# Altium PCB PCB7.PcbDoc
Units mm, origin at the board's own origin, x right, y up, seen from the top; angles counter-clockwise.
Board outline 18 x 29.72 mm, 2 copper layers (Top Layer, Bottom Layer); 24 components, 19 nets, 82 pads, 6 vias.
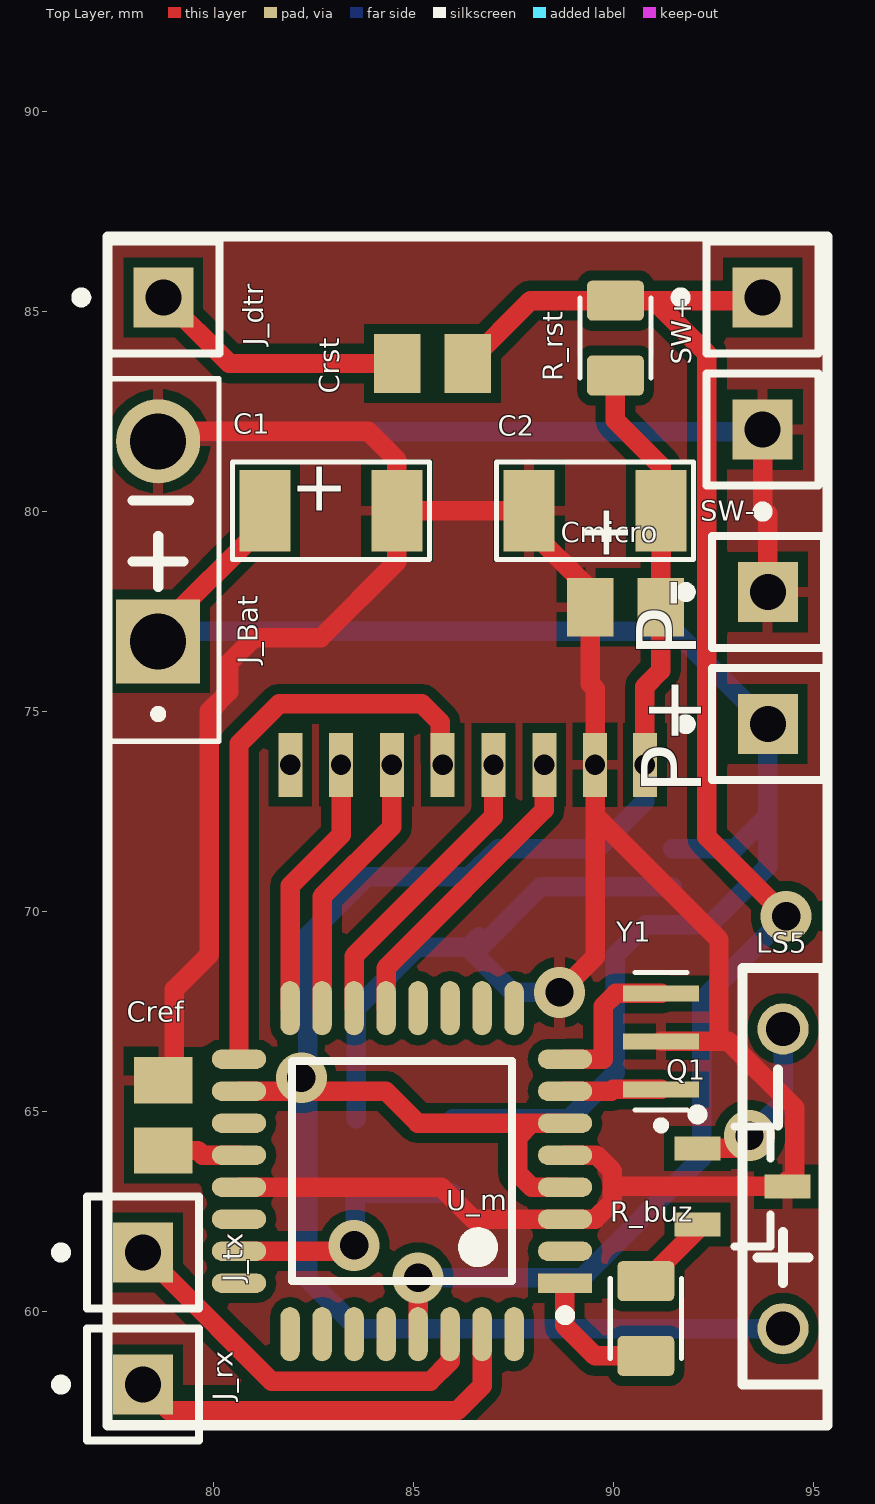
[diagram p0: Top Layer view]
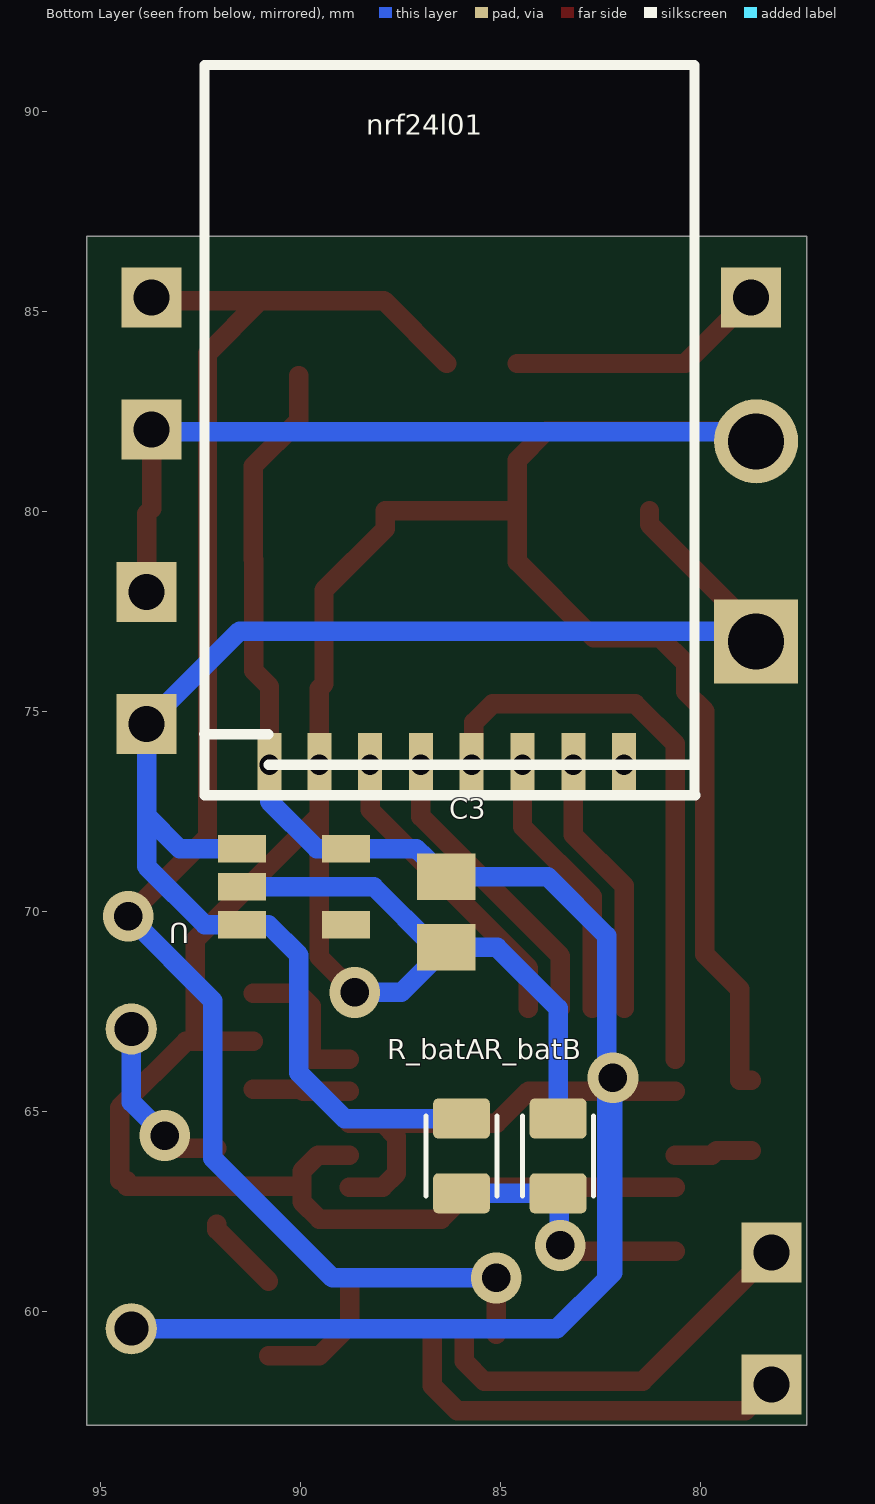
[diagram p1: Bottom Layer view, seen from below]
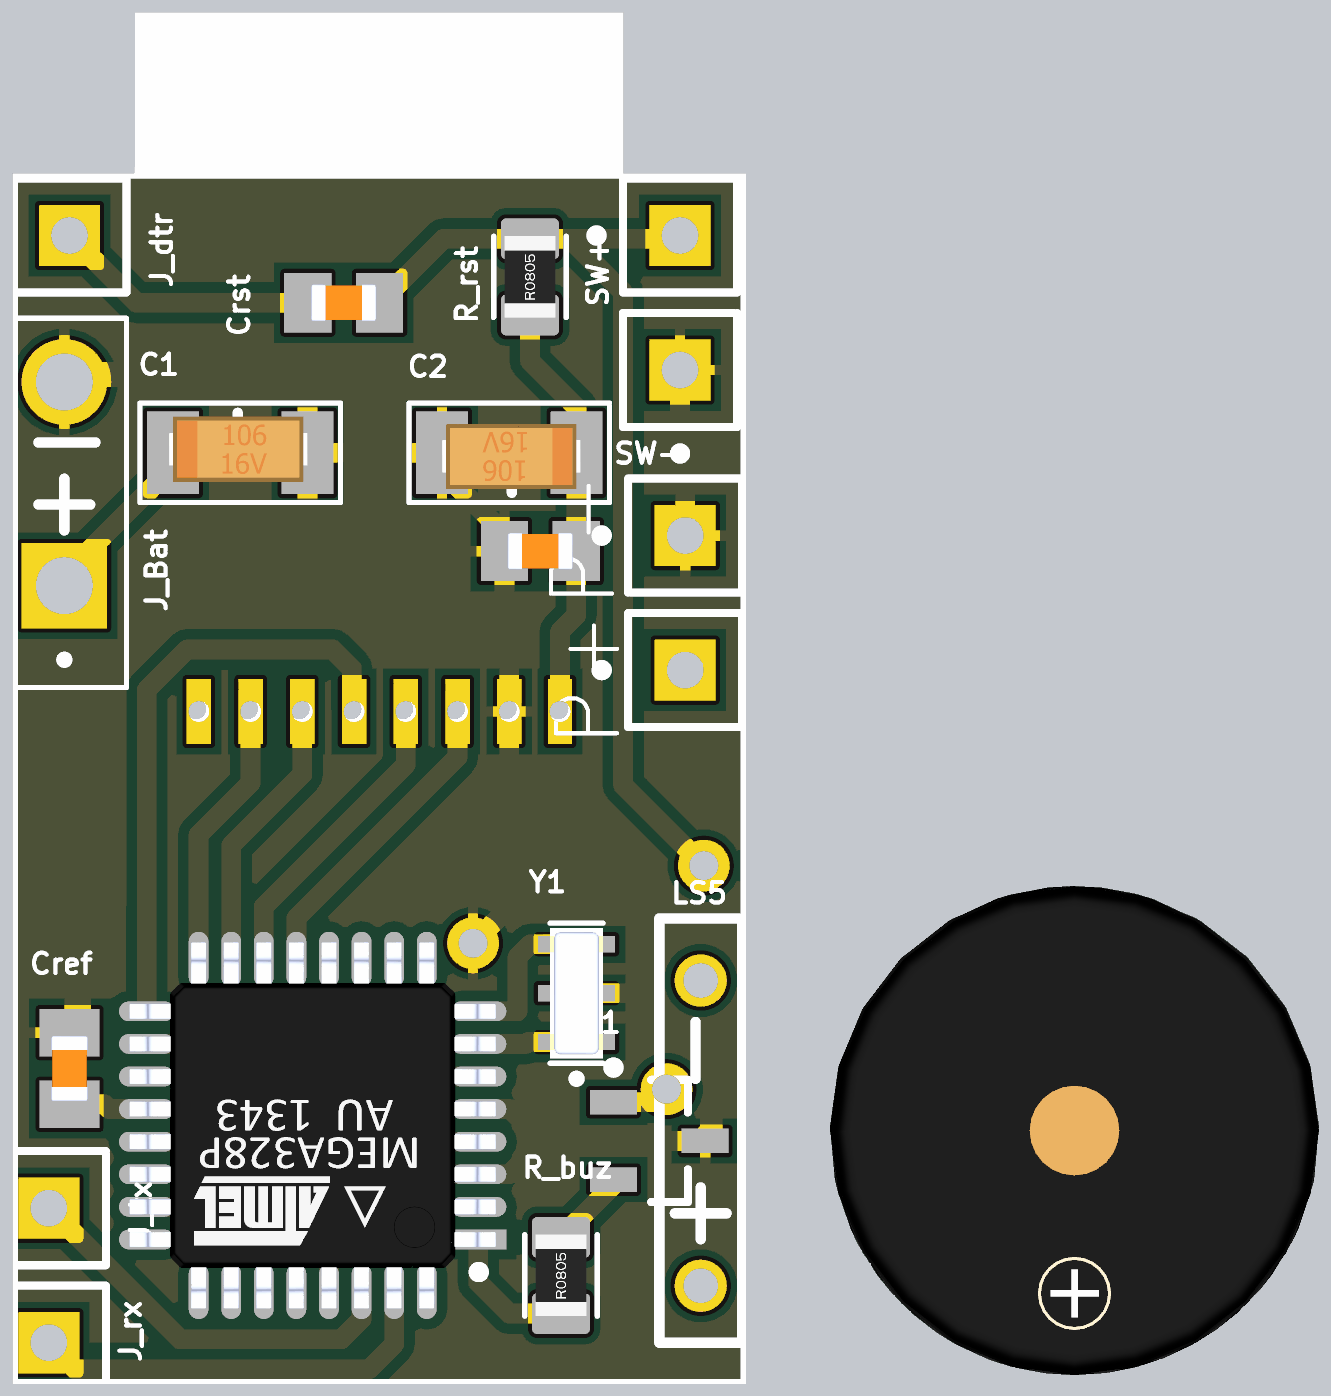
[diagram p2: 3D render of the assembled board from above, using the file's embedded part models]
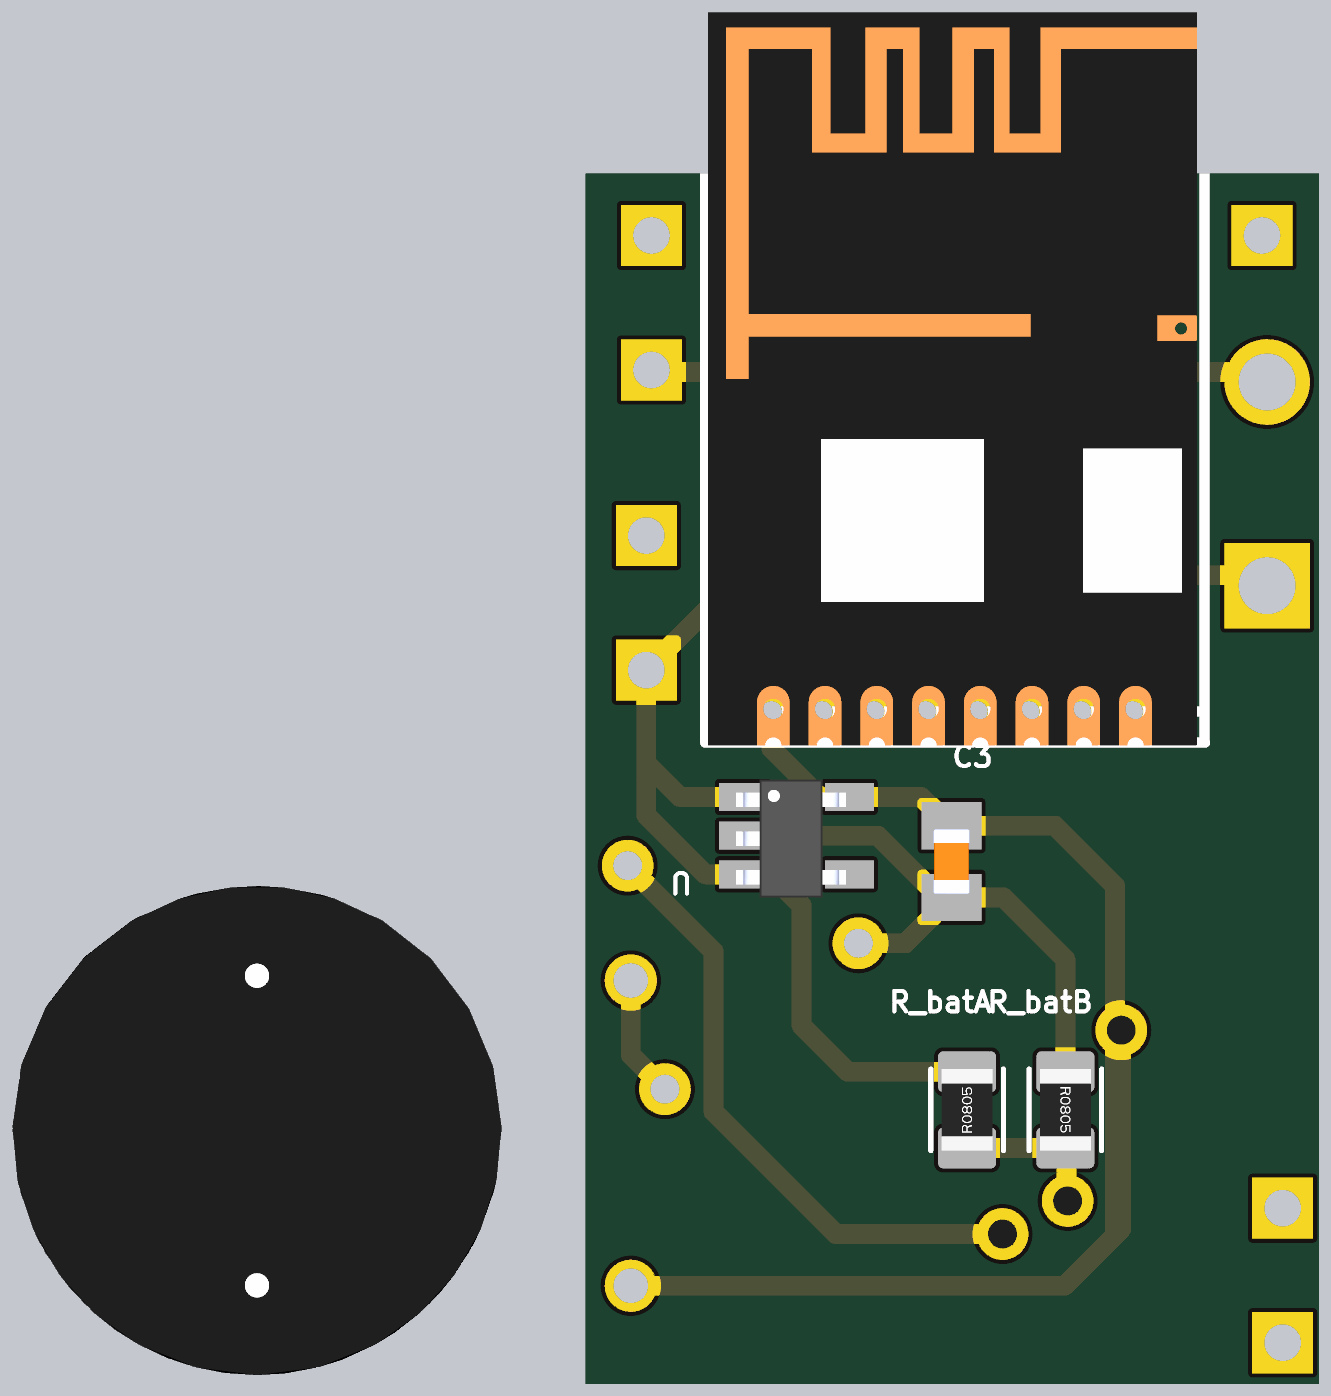
[diagram p3: 3D render of the assembled board from below, using the file's embedded part models]

## Layer stack, top to bottom
Top Solder: solder mask 0.0102, Solder Resist, Dk 3.5
Top Layer: signal copper 0.0356
Dielectric 1: dielectric 0.32, FR-4, Dk 4.8
Bottom Layer: signal copper 0.0356
Bottom Solder: solder mask 0.0102, Solder Resist, Dk 3.5

## Board outline
77.343,57.15 77.343,86.868 95.343,86.868 95.343,57.15

## Design rules (kind name [scope] priority, off if disabled: settings)
Clearance [All] p1: gap=0.254 ignorepadtopadclearanceinfootprint=FALSE except(0: Arc-Hole Track-Hole SMDPad-Hole THPad-Hole Via-Hole Fill-Hole Poly-Hole Region-Hole Text-Hole)
PolygonConnect [All] p1: connectstyle=Relief reliefconductorwidth=0.254 reliefentries=4 polygonreliefangle="90 Angle" airgapwidth=0.254
RoutingVias [All] p1: holewidth=0.711 width=1.27 viastyle="Through Hole" minholewidth=0.711 minwidth=1.27 maxholewidth=0.711 maxwidth=1.27
SolderMaskExpansion [All] p1: expansion=0.102 istentingtop=FALSE
Width [All] p1: maxlimit=0.486 minlimit=0.38 preferedwidth=0.486
30 further rules are at their usual default settings.

## Components (designator, comment, footprint, x,y, rotation, side; value= is the part's Value field where it differs from the comment)
C1 "10uf" CT1206 82.931,80.01 r0 top
C2 "10uf" CT1206 89.535,80.01 r180 top
C3 "0.1uf" CAPC2012X94N 86.36,69.977 r90 bottom
Cmicro "0.1uf" CAPC2012X94N 90.297,77.597 r0 top
Cref "0.1uf" CAPC2012X94N 78.74,64.897 r270 top
Crst "0.1uf" CAPC2012X94N 85.471,83.693 r0 top
J_Bat "KF301-2P" HANDSON_KF301-2P 78.613,79.248 r90 top
J_dtr "Socket" PIN1 78.74,85.344 r90 top
J_rx "Socket" PIN1 78.232,58.166 r90 top
J_tx "Socket" PIN1 78.232,61.468 r90 top
LS5 "PS1240P02BT" XDCR_PS1240P02BT 94.107,63.5 r90 top
nrf24l01 "SMD" NRF24L01 90.805,72.898 r90 bottom locked
P+ "Plug" PIN1 93.853,74.676 r90 top
P- "Plug" PIN1 93.853,77.978 r90 top
Q1 "QNPN" SOT-23B_N 93.218,63.119 r0 top
R_batA "470k" RESC2012X65N 85.979,63.881 r90 bottom
R_batB "1M" RESC2012X65N 83.566,63.881 r270 bottom
R_buz "220" RESC2012X65N 90.805,59.817 r90 top
R_rst "10k" RESC2012X65N 90.043,84.328 r90 top
SW+ "Plug" PIN1 93.726,85.344 r90 top
SW- "Plug" PIN1 93.726,82.042 r180 top
U "3.3reg" SOT-23-5 90.17,70.612 r270 bottom
U_m "ATMEGA328PB-AUR" Microchip_C04-074_IPC_C 84.709,63.5 r180 top
Y1 "clock" OSC_CSTCE8M00G52-R0 91.186,66.745 r90 top

## Footprints (in the part's own frame and the unit in brackets; to place one, negate y for a bottom-side part, rotate by r counter-clockwise, add the part's x,y. Pads: shape width x height; smd on the part's side, far side on the other; paste and mask are expansions set on the pad)
CAPC2012X94N [mm]
  rect 1.16x1.47 smd: 1(-0.88,0) 2(0.88,0)
  body extent -0.8,-0.45 0.8,0.45, height 0.79
CT1206 [mil]
  rect 50x80 smd: NEG(65,0) POS(-65,0)
  silkscreen extent -97,-48 97,48, body extent -69,-28 65,35, height 67
HANDSON_KF301-2P [mm]
  rect 2.1x2.1 hole 1.4: 1(-2.5,0)
  round 2.1 hole 1.4: 2(2.5,0)
  silkscreen extent -5,-1.52 4.06,1.27
Microchip_C04-074_IPC_C [mm]
  rect 1.355x0.486 smd paste+0 mask+0: 1(-4.075,2.8)
  rrect100% 1.355x0.486 smd paste+0 mask+0: 2(-4.075,2) 3(-4.075,1.2) 4(-4.075,0.4) 5(-4.075,-0.4) 6(-4.075,-1.2) 7(-4.075,-2) 8(-4.075,-2.8) 17(4.075,-2.8) 18(4.075,-2) 19(4.075,-1.2) 20(4.075,-0.4) 21(4.075,0.4) 22(4.075,1.2) 23(4.075,2) 24(4.075,2.8)
  rrect100% 0.486x1.355 smd paste+0 mask+0: 9(-2.8,-4.075) 10(-2,-4.075) 11(-1.2,-4.075) 12(-0.4,-4.075) 13(0.4,-4.075) 14(1.2,-4.075) 15(2,-4.075) 16(2.8,-4.075) 25(2.8,4.075) 26(2,4.075) 27(1.2,4.075) 28(0.4,4.075) 29(-0.4,4.075) 30(-1.2,4.075) 31(-2,4.075) 32(-2.8,4.075)
  silkscreen extent -4.2,-2.75 2.75,3.72, body extent -4.5,-4.5 4.5,4.5, height 1
NRF24L01 [mil] "smd"
  rect 62.99x23.62 hole 20: 1(30,-1) 2(30,-49.99) 3(30,-100) 4(30,-150) 5(30,-200) 6(30,-250) 7(30,-300) 8(30,-350)
  silkscreen extent 0,-420 719,63, body extent -3,-412 706,60, height 32
OSC_CSTCE8M00G52-R0 [mm]
  rect 0.4x1.9 smd: 1(-1.2,0) 2(0,0) 3(1.2,0)
  silkscreen extent -2.2,-0.65 1.72,0.65, body extent -1.6,-0.65 1.6,0.65, height 0.8
PIN1 [mm] "Connector; Plug"
  rect 1.5x1.5 hole 0.9: 1(0,0)
  silkscreen extent -1.4,-1.4 1.4,2.17
RESC2012X65N [mm]
  rrect25% 1x1.42 smd: 1(-0.935,0) 2(0.935,0)
  silkscreen extent -1,-0.89 1,0.89, body extent -1,-0.63 1,0.62, height 0.6
SOT-23-5 [mm]
  rect 0.69x1.2 smd: 1(-0.95,-1.3) 2(0,-1.3) 3(0.95,-1.3) 4(0.95,1.3) 5(-0.95,1.3)
  body extent -1.38,-1.48 1.52,1.22, height 1.45
SOT-23B_N [mm] "SOT23, 3-Leads, Body 2.9x1.3mm, Pitch 0.95mm, Lead Span 2.4mm, IPC Medium Density"
  rect 1.15x0.6 smd: 1(-1.125,0.95) 2(-1.125,-0.95) 3(1.125,0)
  silkscreen extent -1.25,-1.5 0.7,1.92, body extent -0.7,-1.5 0.7,1.5, height 1.14
XDCR_PS1240P02BT [mm]
  round 1.28 hole 0.85: 1(-3.937,-0.127) 2(3.556,-0.127)
  silkscreen extent -5.33,-1.14 5.08,0.89, body extent -6.13,-15.3 5.87,-3.3

## Part data
C1 C2: library part TANTALUM-SMD-10UF-20V-20%(1206), "10ÂµF Molded Tantalum Capacitors 20V 1206 _3216 Metric_ 5Ohm", Package="1206 Kemet", Availability=Unavailable, MF=KEMET, MP=T491A106M020AT, Price=None, SnapEDA_Link=https://www.snapeda.com/parts/T491A106M020AT/KEMET/view-part/104616/?ref=snap
C3 Cmicro Cref Crst: library part 0805YC103J4T2A, "10000pF Â±5% 16V Ceramic Capacitor X7R 0805 _2012 Metric_", Package="2012 AVX", Availability=Unavailable, MF=AVX, MP=0805YC103J4T2A, Price=None, SnapEDA_Link=https://www.snapeda.com/parts/0805YC103J4T2A/AVX/view-part/606803/?ref=snap
J_Bat: "2 Pin Terminal Block 5mm Pitch", Package=Package, Availability=Unavailable, MF="Handson Technology", MP=KF301-2P, Price=None, SnapEDA_Link=https://www.snapeda.com/parts/KF301-2P/Handson%20Technology/view-part/4276957/?ref=snap
LS5: "Buzzers Transducer, Externally Driven Piezo 3V 4kHz 60dB @ 3V, 10cm Through Hole PC Pins", Package="2020 TDK", Availability=Unavailable, MF=TDK, MP=PS1240P02BT, Price=None, SnapEDA_Link=https://www.snapeda.com/parts/PS1240P02BT/TDK/view-part/53420/?ref=snap
nrf24l01: library part nrf24l01_smd, Supplier Part Number 1=311-0.0ERCT-ND, Supplier 1=Digi-Key
Q1: "NPN Bipolar Transistor", LatestRevisionDate=29-May-2009, LatestRevisionNote="IPC-7351 Footprint Added.", PackageDescription="3-Pin SOT-23 Package 0.95 mm Pitch, 2.4 mm Lead Span", PackageReference=SOT-23B, PackageVersion=Aug-1999, Published=8-Jun-2000, Publisher="Altium Limited"
R_batA R_batB R_buz R_rst: library part 2-2176053-0, "RES 0.33 OHM 1% 1/4W 0805", Package=0805, Power_Rating=".25 W", Resistance=.33, Tolerance=1%, Availability=Unavailable, EU_RoHS_Compliance="Compliant with Exemptions", MF="TE Connectivity", MP=2-2176053-0, Price=None, SnapEDA_Link=https://www.snapeda.com/parts/2-2176053-0/TE%20Connectivity/view-part/2214508/?ref=snap
U: library part PMIC-MIC5205-3.3YMSTR(SOT23-5), "Linear Voltage Regulator IC 1 Output 150mA SOT-23-5", Package="SOT-23-5 Microchip", Digi-Key_Part_Number=576-1259-1-ND, Digi-Key_Purchase_URL=https://www.digikey.in/product-detail/en/microchip-technology/MIC5205-3.3YM5-TR/576-1259-1-ND/771886?utm_source=snapeda&utm_medium=aggregator&utm_campaign=symbol, MF=Microchip, MP=MIC5205-3.3YM5-TR, SnapEDA_Link=https://www.snapeda.com/parts/MIC5205-3.3YM5-TR/Microchip/view-part/424295/?ref=snap
Y1: library part CSTCE8M00G52-R0, "8MHz Ceramic Resonator Built in Capacitor 10pF Â±0.2% -20Â°C ~ 80Â°C Surface Mount", Package="Surface Mount Murata Electronics North America", Availability=Bad, Check_prices=https://www.snapeda.com/parts/CSTCE8M00G52-R0/Murata%20Electronics%20North%20America/view-part/234504/?ref=eda, MF=Murata, MP=CSTCE8M00G52-R0, Price=None, SnapEDA_Link=https://www.snapeda.com/parts/CSTCE8M00G52-R0/Murata%20Electronics%20North%20America/view-part/234504/?ref=snap
J_dtr J_rx J_tx P+ P- SW+ SW-: LatestRevisionDate=17-Jul-2002, LatestRevisionNote="Re-released for DXP Platform.", Publisher="Altium Limited"

## Via types
v1: diameter 1.27, hole 0.711, Top Layer to Bottom Layer, 6 vias

## Nets (pads, with @x,y where several pads share a name; then routed paths per layer and width w, separated by ;. In a path a pad name is that pad's centre, name@x,y a point inside that pad or via, vN(x,y) a via of type N, cw(c..) or ccw(c..) an arc to the next point about the centre after c; other vN are vias at no path point)
3v3: C2.POS C3.2 Cmicro.2 LS5.1 nrf24l01.1 R_rst.1 U.5 U_m.4 U_m.6 U_m.18 | length 58.4
  Top Layer w0.486: U_m.18 84.303,65.5 85.103,64.7 87.947,64.7 ; U_m.4 87.947,63.1 87.605,63.443 87.605,64.357 87.947,64.7 ; U_m.6 87.947,64.7 ; R_rst.1 90.043,82.271 91.186,81.128 C2.POS 91.186,78.8 91.177,78.791 Cmicro.2 91.177,76.013 90.78,75.616 nrf24l01.1
  Bottom Layer w0.486: v1(82.194,65.837) 82.194,60.96 82.347,60.808 ; nrf24l01.1 90.78,72.746 89.596,71.562 U.5 87.112,71.562 C3.2 83.82,70.857 82.347,69.384 82.347,60.808 ; LS5.1 83.591,59.563 82.347,60.808
BAT: C1.POS J_Bat.1 P+.1 R_batA.2 U.1 U.3 | length 38.8
  Top Layer w0.486: J_Bat.1@78.613,77.002 81.28,79.669 C1.POS
  Bottom Layer w0.486: J_Bat.1@78.613,77.002 91.527,77.002 P+.1 93.853,72.39 ; R_batA.2 88.9,64.816 90.043,65.959 90.043,68.9 90.805,69.662 U.3 92.395,69.662 93.853,71.12 93.853,72.39 ; U.1 93.025,71.562 93.853,72.39
GND: C1.NEG C2.NEG C3.1 Cmicro.1 Cref.1 J_Bat.2 nrf24l01.2 P-.1 Q1.3 R_batB.1 SW-.1 U.2 U_m.3 U_m.5 U_m.21 Y1.2 | length 105.5
  Top Layer w0.486: J_Bat.2@78.613,82.002 83.86,82.002 84.582,81.28 C1.NEG ; Cref.1 79.019,65.777 79.019,68.047 79.894,68.921 79.894,75.003 80.378,75.487 80.378,76.2 81.013,76.835 82.677,76.835 84.582,78.74 C1.NEG ; U_m.21 85.687,63.1 86.487,62.3 U_m.3 89.535,62.3 89.967,62.732 89.967,63.119 ; v1(88.646,67.97) 89.535,68.86 89.535,72.39 ; U_m.5 89.567,63.9 89.967,63.5 89.967,63.119 ; Y1.2 92.634,66.745 ; SW-.1 93.726,80.061 93.853,79.934 P-.1 ; C1.NEG C2.NEG 87.884,79.562 89.417,78.029 Cmicro.1 89.417,75.683 89.535,75.565 nrf24l01.2 89.535,72.39 ; 89.535,72.39 92.634,69.291 92.634,66.745 ; 89.967,63.119 Q1.3 94.343,63.268 94.528,63.268 94.528,65.087 92.87,66.745 92.634,66.745
  Bottom Layer w0.486: J_Bat.2@78.613,82.002 78.624,81.991 93.726,81.991 SW-.1 ; R_batB.1 83.566,67.573 85.09,69.097 C3.1 ; C3.1@86.622,69.359 C3.1 ; v1(88.646,67.97) 87.487,67.97 C3.1 ; U.2 88.172,70.612 86.657,69.097 C3.1
NetCref_2: Cref.2 U_m.20 | length 1.9
  Top Layer w0.486: Cref.2 79.604,64.017 79.721,63.9 U_m.20
NetCrst_1: Crst.1 J_dtr.1 | length 6.5
  Top Layer w0.486: J_dtr.1 80.391,83.693 Crst.1
NetCrst_2: Crst.2 R_rst.2 SW+.1 U_m.29 | length 41.5
  Top Layer w0.486: U_m.29 v1(85.109,60.833) ; Crst.2 87.921,85.263 R_rst.2 91.013,85.263 ; SW+.1 93.645,85.263 91.013,85.263 ; v1(94.31,69.875) 92.329,71.857 92.329,83.947 91.013,85.263
  Bottom Layer w0.486: v1(85.109,60.833) 89.205,60.833 92.2,63.828 92.2,67.765 v1(94.31,69.875)
NetJ_rx_1: J_rx.1 U_m.31 | length 10.3
  Top Layer w0.486: J_rx.1 78.889,57.509 86.084,57.509 86.709,58.134 U_m.31
NetJ_tx_1: J_tx.1 U_m.30 | length 9.9
  Top Layer w0.486: J_tx.1 78.739,60.961 81.45,58.25 85.415,58.25 85.909,58.743 U_m.30
NetLS5_2: LS5.2 Q1.1 | length 4.4
  Top Layer w0.486: Q1.1 93.076,64.069 v1(93.396,64.389)
  Bottom Layer w0.486: v1(93.396,64.389) 94.234,65.227 LS5.2
Netnrf24l01_3: nrf24l01.3 U_m.13 | length 7.7
  Top Layer w0.486: U_m.13 84.309,68.58 88.265,72.536 nrf24l01.3
Netnrf24l01_4: nrf24l01.4 U_m.14 | length 7.5
  Top Layer w0.486: U_m.14 83.509,68.879 86.995,72.365 nrf24l01.4
Netnrf24l01_5: nrf24l01.5 U_m.17 | length 14.6
  Top Layer w0.486: U_m.17 80.634,74.181 81.636,75.184 85.204,75.184 85.668,74.72 85.668,73.717 nrf24l01.5
Netnrf24l01_6: nrf24l01.6 U_m.15 | length 6.8
  Top Layer w0.486: U_m.15 82.709,70.365 84.455,72.111 nrf24l01.6
Netnrf24l01_7: nrf24l01.7 U_m.16 | length 6.6
  Top Layer w0.486: U_m.16 81.909,70.631 83.185,71.907 nrf24l01.7
NetQ1_2: Q1.2 R_buz.2 | length 2
  Top Layer w0.486: R_buz.2 92.093,62.04 Q1.2
NetR_batA_1: R_batA.1 R_batB.2 U_m.23 | length 6.7
  Top Layer w0.486: U_m.23 83.365,61.5 v1(83.51,61.646)
  Bottom Layer w0.486: v1(83.51,61.646) 83.538,61.674 83.538,62.918 R_batB.2 R_batA.1
NetR_buz_1: R_buz.1 U_m.1 | length 3.4
  Top Layer w0.486: U_m.1 88.773,60.7 88.773,59.644 89.535,58.882 R_buz.1
NetU_m_7: U_m.7 Y1.1 | length 2.4
  Top Layer w0.486: U_m.7 89.941,65.5 89.986,65.545 Y1.1
NetU_m_8: U_m.8 Y1.3 | length 3.9
  Top Layer w0.486: U_m.8 89.738,66.3 89.738,67.627 90.056,67.945 Y1.3
pads on no net: nrf24l01.8 U.4 U_m.2 U_m.9 U_m.10 U_m.11 U_m.12 U_m.19 U_m.22 U_m.24 U_m.25 U_m.26 U_m.27 U_m.28 U_m.32

## Polygon pours and split planes (outlines as drawn)
GND on Top Layer "NONET_L-01_P-001" (solid, pour order 0): 77.343,86.868 95.25,86.868 95.25,57.15 77.343,57.15

## Silkscreen, mask and mechanical layers (free items; w line width, h text height)
Top Overlay:
  the board outline again, w0.254

## Text inside footprints (layer, text, board x,y; h text height)
C1: Top Overlay "+" at 81.915,80.01 h1.27
C2: Top Overlay "+" at 90.551,80.01 h1.27 r180